# EAGLE board curtains (EAGLE 9.6.2)

Size 49.4 x 49.4 mm. Coordinates in mm from the lower left corner, seen from the top.
Outline: 0,0 49.4,0 49.4,49.4 0,49.4 0,0
Copper layers (1*16): Top 0.035mm / dielectric 1.5mm / Bottom 0.035mm
Design rules "default": minimum track width 6mil, minimum drill 0.35mm, track to track 6mil, track to pad 6mil, pad to pad 6mil, via to via 6mil, smd to smd 6mil, copper to edge 40mil, drill to drill 6mil, minimum pad ring 10mil, minimum via ring 8mil, stop-mask expansion 4mil, vias tented up to drill 0mil, thermal gap 10mil

## Footprints (pad centres in the part's own frame; a part is rotated, then mirrored left to right if it is on the bottom)
B1,27 = smd 1.27 x 1.27: TP 0,0
2X04 = drill 1.016 pad 1.676 octagon: 1 -3.81,-1.27; 2 -3.81,1.27; 3 -1.27,-1.27; 4 -1.27,1.27; 5 1.27,-1.27; 6 1.27,1.27; 7 3.81,-1.27; 8 3.81,1.27
BT4X4 = smd 1.4 x 1.4: 1 -1.8,3.2; 2 -1.8,-3.2; 3 1.8,3.2; 4 1.8,-3.2
153CLV-0505 = smd 3 x 1.6: + 2.2,0; - -2.2,0
SOT23 = smd 1 x 1.4: 1 -0.95,-1.1; 2 0.95,-1.1; 3 0,1.1
R0603 = smd 0.9 x 1.1: 1 -0.794,0; 2 0.794,0
5050_PLCC6 = smd 2 x 0.9: 1 -2.15,1.55; 2 -2.15,0; 3 -2.15,-1.55; 4 2.15,-1.55; 5 2.15,0; 6 2.15,1.55
MA04-2 = drill 1.016 octagon: 1 -3.81,-1.27; 2 -3.81,1.27; 3 -1.27,-1.27; 4 -1.27,1.27; 5 1.27,-1.27; 6 1.27,1.27; 7 3.81,-1.27; 8 3.81,1.27
R0603' = smd 1 x 1.1: 1 -0.85,0; 2 0.85,0
RC-MASTER-SMD_R0603MP = smd 0.8 x 0.8: 1 -0.762,0; 2 0.762,0
MA03-1 = drill 1.016 long: 1 -2.54,0; 2 0,0; 3 2.54,0
ESP-WROOM-32 = smd 1.5 x 1: 1 -9.25,7; 2 -9.25,5.73; 3 -9.25,4.46; 4 -9.25,3.19; 5 -9.25,1.92; 6 -9.25,0.65; 7 -9.25,-0.62; 8 -9.25,-1.89; 9 -9.25,-3.16; 10 -9.25,-4.43; 11 -9.25,-5.7; 12 -9.25,-6.97; 13 -9.25,-8.24; 14 -9.25,-9.51; 25 9.25,-9.51; 26 9.25,-8.24; 27 9.25,-6.97; 28 9.25,-5.7; 29 9.25,-4.43; 30 9.25,-3.16; 31 9.25,-1.89; 32 9.25,-0.62; 33 9.25,0.65; 34 9.25,1.92; 35 9.25,3.19; 36 9.25,4.46; 37 9.25,5.73; 38 9.25,7 | smd 1 x 1.5: 15 -5.7,-11.25; 16 -4.43,-11.25; 17 -3.16,-11.25; 18 -1.89,-11.25; 19 -0.62,-11.25; 20 0.65,-11.25; 21 1.92,-11.25; 22 3.19,-11.25; 23 4.46,-11.25; 24 5.73,-11.25 | smd 6 x 6: GND 0.3,-0.7
ADVANCED_MONOLITHIC_SYSTEMS_AMS1117-3.3_0 = smd 1.604 x 0.952: 1 -3.395,2.29; 2 -3.395,0; 3 -3.395,-2.29 | smd 1.604 x 3.262: 4 3.395,0

## Placement (x,y rotation side)
3V3  TPB1,27  [B1,27]  2.54,6.35 0 top
3V31  TPB1,27  [B1,27]  2.54,2.54 0 top
5V  TPB1,27  [B1,27]  6.35,6.35 0 top
5V1  TPB1,27  [B1,27]  6.35,2.54 0 top
ATTACH  [2X04]  22.73,16.64 180 bottom
BOOT  [BT4X4]  41.91,11.43 270 top
C1  [153CLV-0505]  20.32,6.35 0 top
CLOSE_B  [BT4X4]  41.91,3.81 270 top
CLOSE_T  MMBT2222  [SOT23]  7.62,34.29 0 top
GND  TPB1,27  [B1,27]  10.16,6.35 0 top
GND1  TPB1,27  [B1,27]  10.16,2.54 0 top
JMP_I  0  [R0603]  7.62,39.37 0 top
JMP_I1  0  [R0603]  12.7,29.21 0 top
JMP_I2  [R0603]  16.51,29.21 0 top
JMP_I3  [R0603]  12.7,26.67 0 top
JMP_I4  [R0603]  16.51,26.67 0 top
JMP_I5  [R0603]  12.7,35.56 0 top
JMP_I6  [R0603]  16.51,35.56 0 top
JMP_I7  [R0603]  12.7,33.02 0 top
JMP_I8  [R0603]  16.51,33.02 0 top
LED1  RGB_6-5050  [5050_PLCC6]  22.86,43.18 0 top
OPEN_B  [BT4X4]  31.75,3.81 270 top
OPEN_T  MMBT2222  [SOT23]  7.62,27.94 0 top
PRG  [MA04-2]  7.62,44.45 0 top
R1  10k  [R0603']  41.91,17.78 0 top
R2  10k  [R0603']  31.75,17.78 0 top
R3  10k  [RC-MASTER-SMD_R0603MP]  3.05,26.54 0 top
R4  10k  [RC-MASTER-SMD_R0603MP]  3.05,33.02 0 top
R5  10k  [R0603]  22.86,36.83 0 top
R6  10k  [R0603]  22.86,34.29 0 top
R7  10k  [R0603]  22.86,31.75 0 top
RESET  [BT4X4]  31.75,11.43 270 top
SV1  [MA03-1]  6.35,11.43 180 top
U1  ESP-WROOM-32  [ESP-WROOM-32]  36.83,33.02 0 top
U3  ADVANCED_MONOLITHIC_SYSTEMS_AMS1117-3.3ADVANCED_MONOLITHIC_SYSTEMS_AMS1117-3.3_0_0  [ADVANCED_MONOLITHIC_SYSTEMS_AMS1117-3.3_0]  6.35,20.32 90 top

## Library data of the parts
3V3 3V31 5V 5V1 GND GND1 = testpad
ATTACH = adafruit
BOOT CLOSE_B OPEN_B RESET = buttons
C1 = rcl; SPICEPREFIX: C
CLOSE_T OPEN_T = semiconductor
JMP_I JMP_I1-JMP_I8 R5-R7 = rc-master
LED1 = led
PRG SV1 = con-lstb; OC_FARNELL: unknown; OC_NEWARK: unknown
R1 = resistor
R2 = resistor; RESISTANCE: 10K
R3 R4 = 52101-101-REV-A_v16
U1 = esp32
U3 = Advanced Monolithic Systems - AMS1117-3.3; AUTOMOTIVE: No; CENTROID_NOT_SPECIFIED: No; DATASHEET: http://www.advanced-monolithic.com/pdf/ds1117.pdf; DEVICE_CLASS_L1: Integrated Circuits (ICs); DEVICE_CLASS_L2: Power Management ICs; DEVICE_CLASS_L3: Voltage Regulators - Linear; DROPOUT_VOLTAGE: 1.1V; FOOTPRINT_PARAMETERS_0: {"fp_type":"SOT223","params":{"N":{"default":"4","long name":"Number of leads","type":"multichoice","short name":"N"},"A":{"nom":false,"long name":"Height","min":false,"max":1800000,"short name":"A","type":"measurement"},"A1":{"nom":false,"long name":"Standoff height","min":640000,"max":840000,"short name":"A1","type":"measurement"},"A2":{"nom":false,"long name":"Package height","min":1160000,"max":false,"short name":"A2","type":"measurement"},"D":{"nom":false,"long name":"Package length","min":6300000,"max":6710000,"short name":"D","type":"measurement"},"E":{"nom":false,"long name":"Width /w leads","min":6710000,"max":7290000,"short name":"E","type":"measurement"},"E1":{"nom":false,"long name":"Package width","min":3300000,"max":3710000,"short name":"E1","type":"measurement"},"B":{"nom":false,"long name":"Lead width","min":640000,"max":840000,"short name":"B","type":"measurement"},"B2":{"nom":false,"long name":"Thermal lead width","min":2950000,"max":3150000,"short name":"B2","type":"measurement"},"C":{"nom":false,"long name":"Lead thickness","min":250000,"max":360000,"short name":"C","type":"measurement"},"L":{"nom":false,"long name":"Lead foot length","min":310000,"max":false,"short name":"L","type":"measurement"},"e":{"nom":2290000,"long name":"Lead pitch","min":null,"max":null,"short name":"e","type":"measurement"},"PHI":{"nom":false,"long name":"Lead angle","min":false,"max":10000000,"short name":"PHI","type":"measurement"},"offset x":{"nom":0,"long name":"X Center offset","min":null,"max":null,"short name":"offset x","type":"measurement"},"offset y":{"nom":0,"long name":"Y Center offset","min":null,"max":null,"short name":"offset y","type":"measurement"},"LS":{"default":"Rounded rectangle","long name":"Land shape","type":"multichoice","short name":"LS"},"LS1":{"default":"Rectangle","long name":"Land shape (Pin 1)","type":"multichoice","short name":"LS1"},"solder toe":{"nom":550000,"long name":"Solder fillet (toe)","min":null,"max":null,"short name":"solder toe","type":"fixedmeasurement"},"solder heel":{"nom":450000,"long name":"Solder fillet (heel)","min":null,"max":null,"short name":"solder heel","type":"fixedmeasurement"},"solder side":{"nom":50000,"long name":"Solder fillet (side)","min":null,"max":null,"short name":"solder side","type":"fixedmeasurement"},"courtyard":{"nom":500000,"long name":"Courtyard","min":null,"max":null,"short name":"courtyard","type":"fixedmeasurement"},"SF":{"default":"A","long name":"Packing level","type":"multichoiceparent","short name":"SF","help":"http://support.upverter.com/customer/portal/articles/978783-what-is-a-footprint-packing-level","children":["solder toe","solder heel","solder side","courtyard"]}}}; FOOTPRINT_PARAMETERS_1: {"fp_type":"SOT223","params":{"N":{"default":"4","long name":"Number of leads","type":"multichoice","short name":"N"},"A":{"nom":false,"long name":"Height","min":false,"max":1800000,"short name":"A","type":"measurement"},"A1":{"nom":false,"long name":"Standoff height","min":640000,"max":840000,"short name":"A1","type":"measurement"},"A2":{"nom":false,"long name":"Package height","min":1160000,"max":false,"short name":"A2","type":"measurement"},"D":{"nom":false,"long name":"Package length","min":6300000,"max":6710000,"short name":"D","type":"measurement"},"E":{"nom":false,"long name":"Width /w leads","min":6710000,"max":7290000,"short name":"E","type":"measurement"},"E1":{"nom":false,"long name":"Package width","min":3300000,"max":3710000,"short name":"E1","type":"measurement"},"B":{"nom":false,"long name":"Lead width","min":640000,"max":840000,"short name":"B","type":"measurement"},"B2":{"nom":false,"long name":"Thermal lead width","min":2950000,"max":3150000,"short name":"B2","type":"measurement"},"C":{"nom":false,"long name":"Lead thickness","min":250000,"max":360000,"short name":"C","type":"measurement"},"L":{"nom":false,"long name":"Lead foot length","min":310000,"max":false,"short name":"L","type":"measurement"},"e":{"nom":2290000,"long name":"Lead pitch","min":null,"max":null,"short name":"e","type":"measurement"},"PHI":{"nom":false,"long name":"Lead angle","min":false,"max":10000000,"short name":"PHI","type":"measurement"},"offset x":{"nom":0,"long name":"X Center offset","min":null,"max":null,"short name":"offset x","type":"measurement"},"offset y":{"nom":0,"long name":"Y Center offset","min":null,"max":null,"short name":"offset y","type":"measurement"},"LS":{"default":"Rounded rectangle","long name":"Land shape","type":"multichoice","short name":"LS"},"LS1":{"default":"Rectangle","long name":"Land shape (Pin 1)","type":"multichoice","short name":"LS1"},"solder toe":{"nom":350000,"long name":"Solder fillet (toe)","min":null,"max":null,"short name":"solder toe","type":"fixedmeasurement"},"solder heel":{"nom":350000,"long name":"Solder fillet (heel)","min":null,"max":null,"short name":"solder heel","type":"fixedmeasurement"},"solder side":{"nom":30000,"long name":"Solder fillet (side)","min":null,"max":null,"short name":"solder side","type":"fixedmeasurement"},"courtyard":{"nom":250000,"long name":"Courtyard","min":null,"max":null,"short name":"courtyard","type":"fixedmeasurement"},"SF":{"default":"B","long name":"Packing level","type":"multichoiceparent","short name":"SF","help":"http://support.upverter.com/customer/portal/articles/978783-what-is-a-footprint-packing-level","children":["solder toe","solder heel","solder side","courtyard"]}}}; FOOTPRINT_PARAMETERS_2: {"fp_type":"SOT223","params":{"N":{"default":"4","long name":"Number of leads","type":"multichoice","short name":"N"},"A":{"nom":false,"long name":"Height","min":false,"max":1800000,"short name":"A","type":"measurement"},"A1":{"nom":false,"long name":"Standoff height","min":640000,"max":840000,"short name":"A1","type":"measurement"},"A2":{"nom":false,"long name":"Package height","min":1160000,"max":false,"short name":"A2","type":"measurement"},"D":{"nom":false,"long name":"Package length","min":6300000,"max":6710000,"short name":"D","type":"measurement"},"E":{"nom":false,"long name":"Width /w leads","min":6710000,"max":7290000,"short name":"E","type":"measurement"},"E1":{"nom":false,"long name":"Package width","min":3300000,"max":3710000,"short name":"E1","type":"measurement"},"B":{"nom":false,"long name":"Lead width","min":640000,"max":840000,"short name":"B","type":"measurement"},"B2":{"nom":false,"long name":"Thermal lead width","min":2950000,"max":3150000,"short name":"B2","type":"measurement"},"C":{"nom":false,"long name":"Lead thickness","min":250000,"max":360000,"short name":"C","type":"measurement"},"L":{"nom":false,"long name":"Lead foot length","min":310000,"max":false,"short name":"L","type":"measurement"},"e":{"nom":2290000,"long name":"Lead pitch","min":null,"max":null,"short name":"e","type":"measurement"},"PHI":{"nom":false,"long name":"Lead angle","min":false,"max":10000000,"short name":"PHI","type":"measurement"},"offset x":{"nom":0,"long name":"X Center offset","min":null,"max":null,"short name":"offset x","type":"measurement"},"offset y":{"nom":0,"long name":"Y Center offset","min":null,"max":null,"short name":"offset y","type":"measurement"},"LS":{"default":"Rounded rectangle","long name":"Land shape","type":"multichoice","short name":"LS"},"LS1":{"default":"Rectangle","long name":"Land shape (Pin 1)","type":"multichoice","short name":"LS1"},"solder toe":{"nom":150000,"long name":"Solder fillet (toe)","min":null,"max":null,"short name":"solder toe","type":"fixedmeasurement"},"solder heel":{"nom":250000,"long name":"Solder fillet (heel)","min":null,"max":null,"short name":"solder heel","type":"fixedmeasurement"},"solder side":{"nom":10000,"long name":"Solder fillet (side)","min":null,"max":null,"short name":"solder side","type":"fixedmeasurement"},"courtyard":{"nom":100000,"long name":"Courtyard","min":null,"max":null,"short name":"courtyard","type":"fixedmeasurement"},"SF":{"default":"C","long name":"Packing level","type":"multichoiceparent","short name":"SF","help":"http://support.upverter.com/customer/portal/articles/978783-what-is-a-footprint-packing-level","children":["solder toe","solder heel","solder side","courtyard"]}}}; FOOTPRINT_VARIANT_NAME_0: IPC_A; FOOTPRINT_VARIANT_NAME_1: IPC_B; FOOTPRINT_VARIANT_NAME_2: IPC_C; HEIGHT: 1.8mm; IPC_LAND_PATTERN_NAME: SOT229P700X180-4; LEAD_FREE: Yes; MAX_JUNCTION_TEMP: +125°C; MAX_POWER_DISSIPATION: 1.2W; MAX_SUPPLY_VOLTAGE: 15V; MF: Advanced Monolithic Systems; MFG_PACKAGE_IDENT: AMS1117; MFG_PACKAGE_IDENT_DATE: 0; MFG_PACKAGE_IDENT_REV: 0; MPN: AMS1117-3.3; NOMINAL_SUPPLY_CURRENT: 5mA; NUMBER_OF_OUTPUTS: 1; OUTPUT_CURRENT: 1A; OUTPUT_TYPE: Fixed; OUTPUT_VOLTAGE: 3.3V; PACKAGE: SOT223-3; PREFIX: U; ROHS: Yes; STANDOFF_HEIGHT: 0.64mm; TEMPERATURE_RANGE_HIGH: +125°C; TEMPERATURE_RANGE_LOW: -40°C; VERIFICATION_VERSION: 0.0.0.3

## Nets
3: ATTACH.3
3V3: 3V3.TP 3V31.TP C1.+ JMP_I.1 PRG.7 PRG.8 R1.2 R2.1 SV1.3 U1.2 U3.2 U3.4
3V30: ATTACH.1 JMP_I.2
5: ATTACH.5
5V: 5V1.TP 5V.TP PRG.5 SV1.2 U3.3
CLOSE: ATTACH.4 JMP_I2.2 JMP_I3.2
GND: ATTACH.7 BOOT.1 BOOT.2 C1.- CLOSE_B.3 CLOSE_B.4 JMP_I1.2 JMP_I4.2 JMP_I6.2 JMP_I7.2 OPEN_B.3 OPEN_B.4 R3.2 R4.2 RESET.1 RESET.2 U1.1 U1.15 U1.38 U1.GND
GND1: GND1.TP GND.TP LED1.4 LED1.5 LED1.6 PRG.1 PRG.2 PRG.3 R7.1 SV1.1 U3.1
LED_G: ATTACH.8 U1.30
LED_R: ATTACH.6 U1.31
N$1: BOOT.3 BOOT.4 R1.1 U1.25
N$2: OPEN_B.1 OPEN_B.2 U1.6
N$3: R2.2 RESET.3 RESET.4 U1.3
N$4: OPEN_T.1 R3.1 U1.10
N$5: CLOSE_T.1 R4.1 U1.11
N$6: R5.2 U1.12
N$7: LED1.2 U1.13
N$8: LED1.3 U1.14
N$9: R6.2 R7.2
N$10: CLOSE_B.1 CLOSE_B.2 U1.7
N$11: LED1.1 R5.1 R6.1
N$13: CLOSE_T.3 JMP_I1.1 JMP_I2.1
N$14: CLOSE_T.2 JMP_I3.1 JMP_I4.1
N$15: JMP_I7.1 JMP_I8.1 OPEN_T.2
N$17: JMP_I5.1 JMP_I6.1 OPEN_T.3
OPEN: ATTACH.2 JMP_I5.2 JMP_I8.2
RXD: PRG.4 U1.34
TXD: PRG.6 U1.35

## Tracks (layer width: path | path; a pad name or v marks a point on that pad's centre or on a via)
3V3  (11 unrouted)
3V30  (1 unrouted)
5V  (4 unrouted)
CLOSE  (2 unrouted)
GND  (19 unrouted)
GND1  (10 unrouted)
LED_G  (1 unrouted)
LED_R  (1 unrouted)
N$1  (3 unrouted)
N$2  (2 unrouted)
N$3  (3 unrouted)
N$4  (2 unrouted)
N$5  (2 unrouted)
N$6  (1 unrouted)
N$7  (1 unrouted)
N$8  (1 unrouted)
N$9  (1 unrouted)
N$10  (2 unrouted)
N$11  (2 unrouted)
N$13  (2 unrouted)
N$14  (2 unrouted)
N$15  (2 unrouted)
N$17  (2 unrouted)
OPEN  (2 unrouted)
RXD  (1 unrouted)
TXD  (1 unrouted)
(copper drawn outside any net)
  shapes: Top area x3